# Altium PCB WirelessLamp.PcbDoc (part 1 of 2)
Units mm, origin at the board's own origin, x right, y up, seen from the top; angles counter-clockwise.
Board outline 95.76 x 95.69 mm, 2 copper layers (Top Layer, Bottom Layer); 124 components, 86 nets, 387 pads, 228 vias.
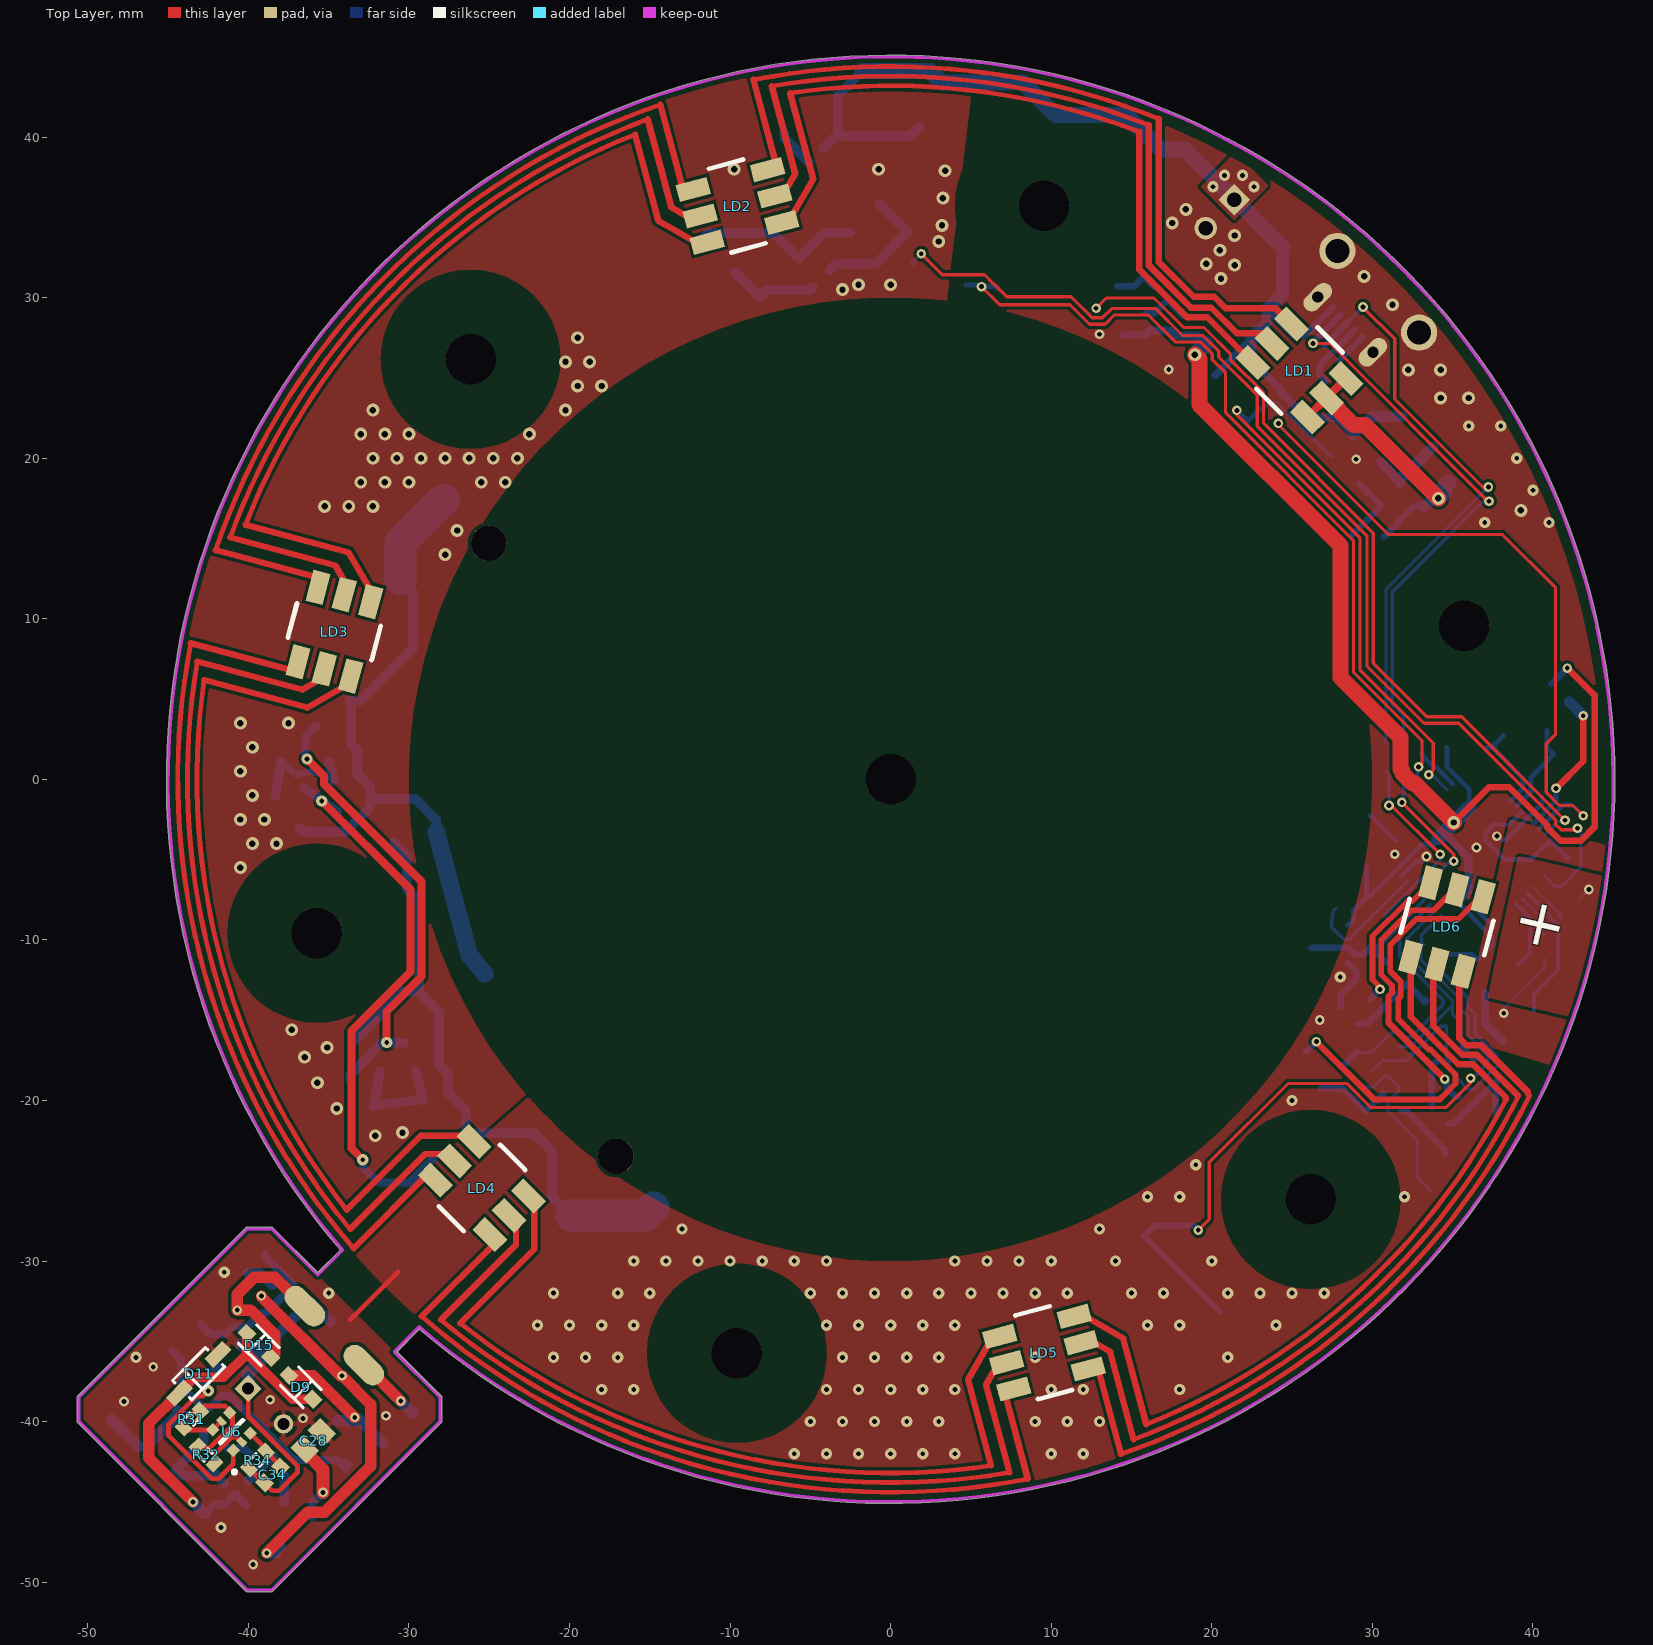
[diagram p0: Top Layer view]
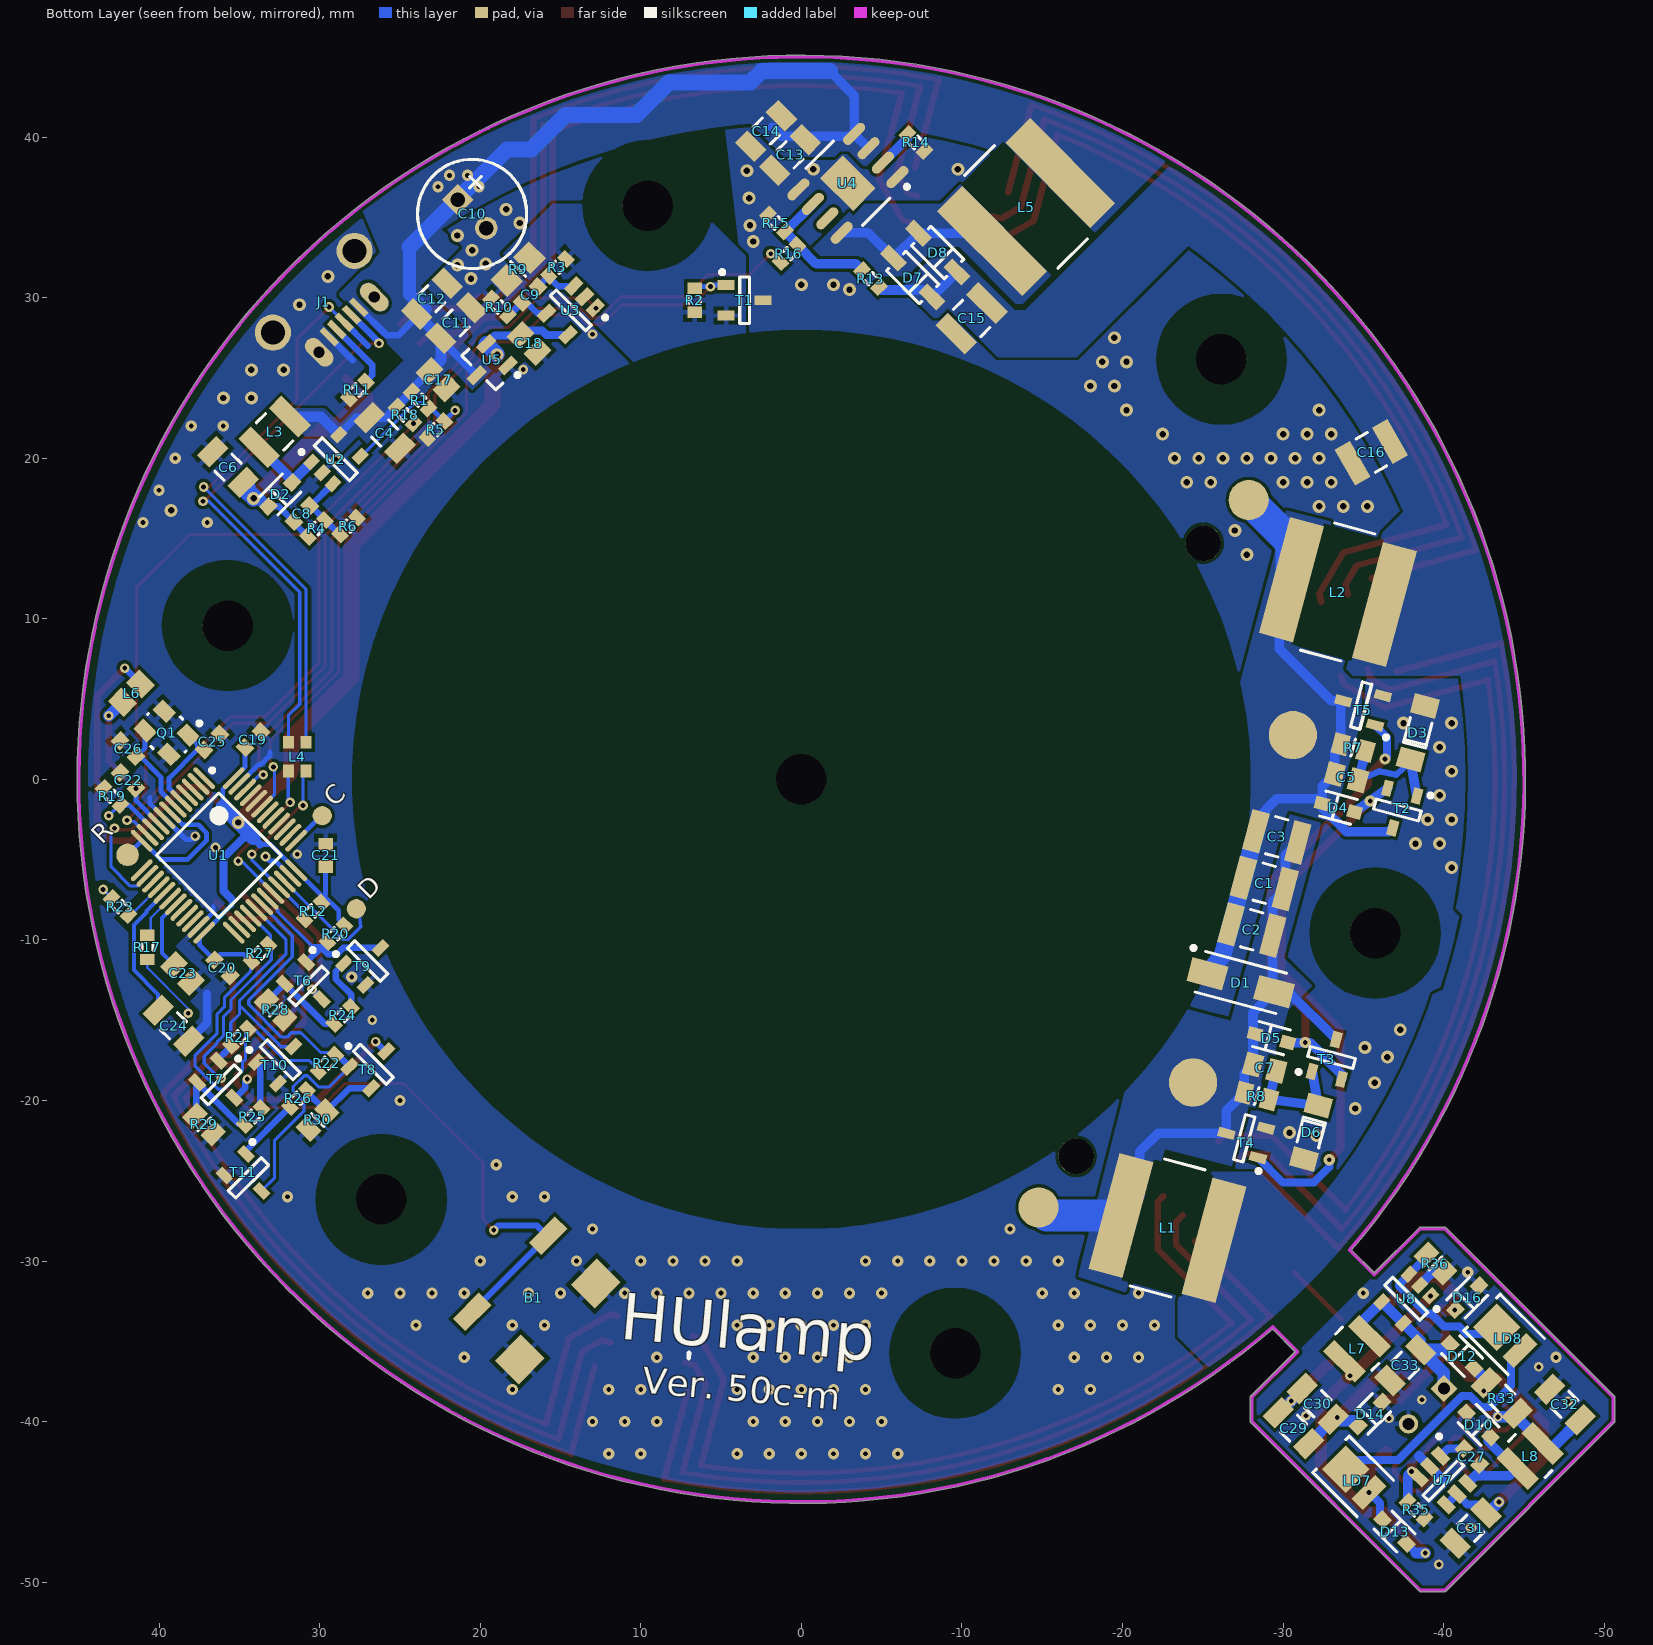
[diagram p1: Bottom Layer view, seen from below]

## Layer stack, top to bottom
Top Solder: solder mask 0.0102, Solder Resist, Dk 3.5
Top Layer: signal copper 0.0356
Dielectric 1: dielectric 0.32, FR-4, Dk 4.8
Bottom Layer: signal copper 0.0356
Bottom Solder: solder mask 0.0102, Solder Resist, Dk 3.5

## Board outline
-50.661,-39.991 ccw(c-50.561,-39.991) -50.632,-40.062 -40.132,-50.562 ccw(c-40.061,-50.491) -40.061,-50.592 -38.561,-50.592 ccw(c-38.561,-50.491) -38.49,-50.562 -27.99,-40.062 ccw(c-28.061,-39.991) -27.96,-39.991 -27.96,-38.491 ccw(c-28.061,-38.491) -27.99,-38.42 -30.765,-35.645 -29.358,-34.237 ccw(c0,0) 45.1,0 ccw(c0,0) -34.27,-29.319 -35.68,-30.73 -38.49,-27.92 ccw(c-38.561,-27.991) -38.561,-27.891 -40.061,-27.891 ccw(c-40.061,-27.991) -40.132,-27.92 -50.632,-38.42 ccw(c-50.561,-38.491) -50.661,-38.491

## Design rules (kind name [scope] priority, off if disabled: settings)
BoardOutlineClearance [All] p1: gap=0.3 ignorepadtopadclearanceinfootprint=FALSE except(0: Arc-SplitContinuation Track-SplitContinuation SMDPad-SplitContinuation THPad-SplitContinuation Via-SplitContinuation Fill-SplitContinuation Poly-SplitContinuation Region-SplitContinuation Text-SplitContinuation)
Clearance Clearance_3 [(Net = Touch_Button)] p1: gap=0.3 ignorepadtopadclearanceinfootprint=FALSE except(0: Arc-Hole Track-Hole SMDPad-Hole THPad-Hole Via-Hole Fill-Hole Poly-Hole Region-Hole Text-Hole)
Clearance Clearance_1 [OnLayer('Top Layer') vs (PadXSize_AllLayers >= 3.1) And (PadYSize_AllLayers >= 3.1)] p2: gap=4 ignorepadtopadclearanceinfootprint=FALSE except(0: Arc-Hole Track-Hole SMDPad-Hole THPad-Hole Via-Hole Fill-Hole Poly-Hole Region-Hole Text-Hole)
Clearance Clearance_2 [OnLayer('Bottom Layer') vs (PadXSize_AllLayers >= 3.1) And (PadYSize_AllLayers >= 3.1)] p3: gap=2.5 ignorepadtopadclearanceinfootprint=FALSE except(0: Arc-Hole Track-Hole SMDPad-Hole THPad-Hole Via-Hole Fill-Hole Poly-Hole Region-Hole Text-Hole)
Clearance [All] p4: gap=0.2 ignorepadtopadclearanceinfootprint=FALSE except(0: Arc-Hole Track-Hole SMDPad-Hole THPad-Hole Via-Hole Fill-Hole Poly-Hole Region-Hole Text-Hole)
ComponentClearance [All] p1: gap=0.1 collisioncheckmode=3 verticalgap=0.254 showdistances=FALSE
DiffPairsRouting [All] p1: maxlimit=2 minlimit=0.2 mostfreqgap=0.3 toplayer_minwidth=0.2 toplayer_maxwidth=0.4 toplayer_prefwidth=0.3 bottomlayer_minwidth=0.2 bottomlayer_maxwidth=0.4 bottomlayer_prefwidth=0.3 maxuncoupledlength=12.7
HoleSize [All] p1: absolutevalues=TRUE maxlimit=5 minlimit=0.3 maxpercent=80.000 minpercent=20.000
MinimumSolderMaskSliver [All] p1: minsoldermaskwidth=0.2
PlaneConnect [All] p1: planeconnectstyle=Relief reliefexpansion=0.508 reliefentries=4 reliefconductorwidth=0.3 reliefairgap=0.254
PolygonConnect "10V Net" [InNet('10V')] p1: connectstyle=Direct reliefconductorwidth=0.254 reliefentries=4 polygonreliefangle="90 Angle" airgapwidth=0.254
PolygonConnect Components [(Component = C10) Or (Component = C11) Or (Component = C12) Or (Component = R9) Or (Component = J1)] p2: connectstyle=Direct reliefconductorwidth=0.254 reliefentries=4 polygonreliefangle="90 Angle" airgapwidth=0.254
PolygonConnect "Power Nets" [(Net = TxCore1) Or (Net = TxCore2) Or (Net = Touch_Button) Or (Net = Touch_Shield) Or (Net = NetD7_1)] p3: connectstyle=Direct reliefconductorwidth=0.254 reliefentries=4 polygonreliefangle="90 Angle" airgapwidth=0.254
PolygonConnect "Power shunt line" [InNet('NetR1_2')] p4: connectstyle=Direct reliefconductorwidth=0.254 reliefentries=4 polygonreliefangle="90 Angle" airgapwidth=0.254
PolygonConnect "5V Net" [InNet('5V')] p5: connectstyle=Direct reliefconductorwidth=0.254 reliefentries=4 polygonreliefangle="90 Angle" airgapwidth=0.254
PolygonConnect Shunt [(Component = R5) And (Net = GND)] p6: connectstyle=Direct reliefconductorwidth=0.254 reliefentries=4 polygonreliefangle="90 Angle" airgapwidth=0.254
PolygonConnect Vias [InNet('GND') vs IsVia] p7: connectstyle=Direct reliefconductorwidth=0.254 reliefentries=4 polygonreliefangle="90 Angle" airgapwidth=0.254
PolygonConnect "aGND Net" [InNet('aGND')] p8: connectstyle=Direct reliefconductorwidth=0.254 reliefentries=4 polygonreliefangle="90 Angle" airgapwidth=0.254
PolygonConnect [All] p9: connectstyle=Relief reliefconductorwidth=0.3 reliefentries=4 polygonreliefangle="90 Angle" airgapwidth=0.254
RoutingVias [All] p1: holewidth=0.3 width=0.7 viastyle="Through Hole" minholewidth=0.3 minwidth=0.6 maxholewidth=4 maxwidth=5
SilkToSilkClearance [All] p1: silktosilkclearance=0
SilkToSolderMaskClearance [IsPad] p1: minsilkscreentomaskgap=0.1 clearancetoexposedcopper=TRUE
SolderMaskExpansion [All] p1: expansion=0.102
Width [All] p1: maxlimit=2 minlimit=0.127 preferedwidth=0.3 minimp=50.000000 maximp=50.000000 favimp=50.000000
23 further rules are at their usual default settings.

## Classes and differential pairs
component class WirelessLamp: B1 C1 C2 C3 C4 C5 C6 C7 C8 C9 C10 C11 C12 C13 C14 C15 C16 C17 C18 C19 C20 C21 C22 C23 C24 C25 C26 C? D1 D2 D3 D4 D5 D6 D7 D8 D? J1 L1 L2 L3 L4 L5 L6 L? LD1 LD2 LD3 LD4 LD5 LD6 Q1 Q? R1 R2 R3 R4 R5 R6 R7 R8 R9 R10 R11 R12 R13 R14 R15 R16 R17 R18 R19 R20 R21 R22 R23 R24 R25 R26 R27 R28 R29 R30 R? T1 T2 T3 T4 T5 T6 T7 T8 T9 T10 T11 U1 U2 U3 U4 U5
component class WirelessLampReceiver: C27 C28 C29 C30 C31 C32 C33 C34 D9 D10 D11 D12 D13 D14 D15 D16 L7 L8 LD7 LD8 R31 R32 R33 R34 R35 R36 U6 U7 U8 U9
differential pair USB_D: +USB_D_P -USB_D_N

## Components (designator, comment, footprint, x,y, rotation, side; value= is the part's Value field where it differs from the comment)
B1 "Button 5.1x5.1" "TS-1187 combo" 16.829,-32.103 r135 bottom
C1 "47n" CAPC3225L -28.837,-6.477 r15 bottom
C2 "47n" CAPC3225L -28.06,-9.374 r15 bottom
C3 "47n" CAPC3225L -29.613,-3.579 r15 bottom
C4 "4.7u" CAPC3216L 25.951,21.567 r225 bottom
C5 "200p" CAPC2012L -33.941,0.141 r195 bottom
C6 "4.7u" CAPC3216L 35.709,19.445 r225 bottom
C7 "200p" CAPC2012L -28.85,-17.961 r195 bottom
C8 "4.7p" CAPC1608L 31.113,16.546 r315 bottom
C9 "1u" CAPC1608L 16.9,30.193 r135 bottom
C10 "330u" CAPPR250-680X1080 20.506,35.214 r225 bottom
C11 "10u" CAPC3216L 21.496,28.426 r315 bottom
C12 "10u" CAPC3216L 23.009,29.939 r315 bottom
C13 "10u" CAPC3216L 0.707,38.891 r135 bottom
C14 "10u" CAPC3216L 2.192,40.376 r135 bottom
C15 "10u" CAPC3225L -10.607,28.709 r135 bottom
C16 "10u" CAPC3225L -35.497,20.365 r150 bottom
C17 "1u" CAPC2012L 22.627,24.89 r45 bottom
C18 "1u" CAPC2012L 16.971,27.153 r45 bottom
C19 "0.1u" CAPC1608L 34.153,2.475 r315 bottom
C20 "0.1u" CAPC1608L 36.062,-11.738 r45 bottom
C21 "0.1u" CAPC1608L 29.628,-4.738 r270 bottom
C22 "1u" CAPC1608L 41.931,-0.071 r225 bottom
C23 "0.1u" CAPC2012L 38.537,-12.092 r45 bottom
C24 "47n" CAPC3216L 39.103,-15.344 r45 bottom
C25 "18p" CAPC1608L 36.699,2.333 r135 bottom
C26 "18p" CAPC1608L 41.931,1.909 r45 bottom
C27 "0.1u" CAPC1608L -41.756,-42.181 r225 bottom
C28 "4.7u" CAPC2012L -35.958,-41.191 r45 top
C29 "47n" CAPC3216L -30.655,-40.413 r45 bottom
C30 "47n" CAPC3216L -32.161,-38.891 r225 bottom
C31 "4.7u" CAPC3216L -41.686,-46.635 r135 bottom
C32 "22u" CAPC3216L -47.555,-38.928 r225 bottom
C33 "22u" CAPC3216L -37.618,-36.487 r135 bottom
C34 "120p" CAPC1608L -38.504,-43.312 r225 top
D1 "SMAFJ36CA" DIOM5226X262N -27.365,-12.657 r195 bottom
D2 "SGP0160SL" SOD-323F 32.456,17.748 r315 bottom
D3 "ZMM5246B" MELF-D3512-1405 -38.396,2.899 r285 bottom
D4 "SGP0160SL" SOD-323F -33.446,-1.768 r15 bottom
D5 "SGP0160SL" SOD-323F -29.274,-16.122 r15 bottom
D6 "ZMM5246B" MELF-D3512-1405 -31.749,-21.991 r105 bottom
D7 "DS24W" SOD123 -6.93,31.254 r225 bottom
D8 "DS24W" SOD123 -8.485,32.81 r225 bottom
D9 "SGP0160SL" SOD-323F -36.736,-37.867 r315 top
D10 "SGP0160SL" SOD-323F -42.181,-40.201 r225 bottom
D11 "MM1Z39" SOD123 -43.1,-37.019 r225 top value=39V
D12 "SGP0160SL" SOD-323F -41.154,-35.921 r45 bottom
D13 "SGP0160SL" SOD-323F -36.948,-46.847 r45 bottom
D14 "SGP0160SL" SOD-323F -35.426,-39.527 r315 bottom
D15 "SGP0160SL" SOD-323F -39.352,-35.251 r135 top
D16 "SGP0160SL" SOD-323F -41.473,-32.281 r315 bottom
J1 "USB Con" ZX62D-B-5PA8 31.891,31.891 r225 bottom
L1 "68u" "Ind 8x8" -22.806,-27.938 r195 bottom
L2 "68u" "Ind 8x8" -33.418,11.665 r15 bottom
L3 "10u" INDC3225L 32.81,21.637 r315 bottom
L4 "MCM2012B" MCM2012B 31.396,1.414 r270 bottom
L5 "4.7u" "Ind 8x8" -14.001,35.638 r315 bottom
L6 "22u" INDC2012L 41.719,5.374 r315 bottom
L7 "10u" "Ind 3x3" -34.614,-35.463 r315 bottom
L8 "10u" "Ind 3x3" -45.396,-42.144 r135 bottom
LD1 "LED" LED5060 25.456,25.456 r135 top
LD2 "LED" LED5060 -9.546,35.709 r195 top
LD3 "LED" LED5060 -34.648,9.192 r255 top
LD4 "LED" LED5060 -25.456,-25.456 r315 top
LD5 "LED" LED5060 9.546,-35.709 r15 top
LD6 "LED" LED5060 34.648,-9.192 r75 top
LD7 "LED2825" LED2835 -34.473,-43.524 r45 bottom
LD8 "LED2825" LED2835 -43.878,-34.685 r45 bottom
Q1 "12Meg" XTAL_ABRACON_ABM8-166 39.527,2.899 r315 bottom
R1 "10k" RESC1608L 23.759,23.617 r45 bottom
R2 "10k" RESC1608L 6.647,29.84 r270 bottom
R3 "4.7" RESC1608L 15.203,31.891 r135 bottom
R4 "150k" RESC1608L 30.193,15.627 r315 bottom
R5 "10k" RESC1608L 22.769,21.779 r135 bottom
R6 "10k" RESC1608L 28.214,15.768 r315 bottom
R7 "4.7k" RESC2012L -34.365,1.98 r195 bottom
R8 "4.7k" RESC2012L -28.355,-19.728 r195 bottom
R9 "7.5m" RESC2012M 17.638,31.78 r135 bottom
R10 "4.7" RESC1608L 18.809,29.416 r45 bottom
R11 "1k" RESC1608L 27.648,24.254 r315 bottom
R12 "1k5" RESC1608L 30.406,-8.202 r315 bottom
R13 "16k" RESC1608L -4.313,31.183 r225 bottom
R14 "47k" RESC1608L -7.142,39.669 r45 bottom
R15 "1k" RESC1608L 1.556,34.648 r225 bottom
R16 "10k" RESC1608L 0.778,32.739 r315 bottom
R17 "1k" RESC1608L 40.729,-10.465 r270 bottom
R18 "10k" RESC1608L 24.678,22.698 r45 bottom
R19 "1k" RESC1608L 42.921,-1.061 r225 bottom
R20 "10k" RESC1608L 28.991,-9.617 r135 bottom
R21 "10k" RESC1608L 35.002,-16.051 r135 bottom
R22 "10k" RESC1608L 29.557,-17.678 r315 bottom
R23 "1k" RESC1608L 42.426,-7.92 r225 bottom
R24 "4.7k" RESC1608L 28.567,-14.708 r135 bottom
R25 "4.7k" RESC1608L 34.153,-21.001 r135 bottom
R26 "4.7k" RESC1608L 31.325,-19.87 r315 bottom
R27 "10k" RESC1608L 33.729,-10.819 r315 bottom
R28 "470" RESC2012L 32.739,-14.354 r225 bottom
R29 "300" RESC2012L 37.194,-21.496 r45 bottom
R30 "470" RESC2012L 30.123,-21.213 r135 bottom
R31 "47k" RESC1608L -43.524,-39.847 r45 top
R32 "47k" RESC1608L -42.639,-42.073 r315 top
R33 "1.5" RESC3216L -43.628,-38.537 r45 bottom
R34 "36k" RESC1608L -39.423,-42.393 r225 top
R35 "16k" RESC1608L -38.291,-45.504 r45 bottom
R36 "120" RESC2012L -39.494,-30.16 r45 bottom
T1 "NCE3416" SOT95P237X112-3N 3.536,29.84 r180 bottom
T2 "BC847B" SOT95P230X110-3N -37.123,-1.909 r285 bottom
T3 "BC847B" SOT95P230X110-3N -33.022,-17.324 r105 bottom
T4 "NCE6003" SOT95P237X112-3N -27.577,-22.345 r15 bottom
T5 "NCE6003" SOT95P237X112-3N -34.86,4.596 r15 bottom
T6 "2N7002K" SOT95P237X112-3N 30.688,-12.869 r225 bottom
T7 "2N7002K" SOT95P237X112-3N 36.133,-19.021 r225 bottom
T8 "2N7002K" SOT95P237X112-3N 26.658,-17.748 r135 bottom
T9 "BC847B" SOT95P230X110-3N 27.011,-11.314 r135 bottom
T10 "BC847B" SOT95P230X110-3N 32.456,-17.466 r135 bottom
T11 "BC847B" SOT95P230X110-3N 34.436,-24.819 r225 bottom
U1 "STM32F072C8T6" STM-LQFP48_N 36.275,-4.738 r225 bottom
U2 "TPS6104x" SOT23-5AL 28.991,19.94 r135 bottom
U3 "INA180A" SOT23-5AN 14.354,29.204 r315 bottom
U4 "FP6298" SOIC127P600-8DL -2.899,37.123 r315 bottom
U5 "MCP1700" SOT23-3L 19.587,25.809 r315 bottom value=3.3V
U6 "BC847BPN" sot-363-6 -41.049,-40.625 r135 top
U7 "BL9352A" SOT26A-6N -39.988,-43.665 r225 bottom
U8 "AP3015KTR-G1" SOT23-5AL -37.669,-32.35 r315 bottom

## Footprints (in the part's own frame and the unit in brackets; to place one, negate y for a bottom-side part, rotate by r counter-clockwise, add the part's x,y. Pads: shape width x height; smd on the part's side, far side on the other; paste and mask are expansions set on the pad)
CAPC1608L [mm] "Chip Capacitor, Body 1.6x0.8mm, IPC High Density"
  rect 0.8x0.9 smd: 1(-0.7,0) 2(0.7,0)
  body extent -0.87,-0.48 0.87,0.47, height 0.85
CAPC2012L [mm] "Chip Capacitor, Body 2.0x1.3mm, IPC High Density"
  rect 1.1x1.4 smd: 1(-0.75,0) 2(0.75,0)
  body extent -1.1,-0.73 1.1,0.73, height 1.1
CAPC3216L [mm] "Chip Capacitor, Body 3.2x1.6mm, IPC High Density"
  rect 1.1x1.7 smd: 1(-1.35,0) 2(1.35,0)
  silkscreen extent -0.4,-0.75 0.4,0.75, body extent -1.7,-0.9 1.7,0.9, height 1.35
CAPC3225L [mm] "Chip Capacitor, Body 3.2x2.5mm, IPC High Density"
  rect 1.1x2.6 smd: 1(-1.35,0) 2(1.35,0)
  silkscreen extent -0.4,-1.2 0.4,1.2, body extent -1.7,-1.35 1.7,1.35, height 1.35
CAPPR250-680X1080 [mm] "Capacitor, Radial, Pin spacing 2.5mm - Body Diameter 6.8mm X Body Height 10.8mm"
  rect 1.4x1.4 hole 0.9: 1(-1.25,0)
  round 1.4 hole 0.9: 2(1.25,0)
  silkscreen extent -3.4,-3.4 3.4,3.4, body extent -3.41,-3.41 3.39,3.39, height 10.8
DIOM5226X262N [mm] "DO-214-AC/SMA Diode, Molded Body; 5.21mm L X 2.605mm W X 2.62mm H, IPC Medium Density"
  rect 2.3x1.55 smd: 1(-2.15,0) 2(2.15,0)
  silkscreen extent -3.52,-1.3 2.6,1.45, body extent -2.6,-1.3 2.6,1.31, height 2.62
"Ind 3x3" [mm]
  rect 1x2.8 smd: 1(-1.1,0) 2(1.1,0)
  silkscreen extent -0.3,-1.6 0.3,1.6
"Ind 8x8" [mm]
  rect 2.2x7.5 smd: 1(-3,0) 2(3,0)
  silkscreen extent -1.3,-4.1 1.3,4.1
INDC2012L [mm] "Chip Inductor, Body 2.0x1.2mm, IPC High Density"
  rect 1.2x1.4 smd: 1(-0.8,0) 2(0.8,0)
  body extent -1.1,-0.7 1.1,0.7, height 1.1
INDC3225L [mm] "Chip Inductor, Body 3.2x2.5mm, IPC High Density"
  rect 1.1x2.6 smd: 1(-1.35,0) 2(1.35,0)
  silkscreen extent -0.4,-1.2 0.4,1.2, body extent -1.7,-1.35 1.7,1.35, height 1.5
LED2835 [mm]
  rect 2.1x2.1 smd: 1(0.8,0)
  rect 1x2.1 smd: 2(-1.25,0)
  silkscreen extent -1.8,-1.6 2.1,1.6
LED5060 [mm]
  rect 2x1.1 smd: 1(-2.4,1.7) 2(-2.4,0) 3(-2.4,-1.7) 4(2.4,-1.7) 5(2.4,0) 6(2.4,1.7)
  silkscreen extent -1.1,-2.7 1.1,2.7
MCM2012B [mm]
  rect 0.8x0.7 smd: 1(-0.9,0.55) 2(0.9,0.55) 3(0.9,-0.55) 4(-0.9,-0.55)
MELF-D3512-1405 [mm] "Metal Electrode Face (MELF) Diode; Body 3.5 x 1.5 mm (LxDia)"
  rect 1.25x1.6 smd: 1(-1.725,0) 2(1.725,0)
  silkscreen extent -0.8,-0.7 0.8,0.7
RESC1608L [mm] "Chip Resistor, Body 1.6x0.8mm, IPC High Density"
  rect 0.7x0.9 smd: 1(-0.75,0) 2(0.75,0)
  silkscreen extent -0.2,-0.35 0.2,0.35, body extent -0.85,-0.47 0.85,0.48, height 0.6
RESC2012L [mm] "Chip Resistor, Body 2.0x1.3mm, IPC High Density"
  rect 1x1.3 smd: 1(-0.8,0) 2(0.8,0)
  silkscreen extent 0,-0.55 0,0.55, body extent -1.07,-0.7 1.08,0.7, height 0.65
RESC2012M [mm] "Chip Resistor, Body 2.0x1.3mm, IPC Low Density"
  rect 1.4x1.5 smd: 1(-1,0) 2(1,0)
  silkscreen extent 0,-0.65 0,0.65, body extent -1.07,-0.7 1.07,0.7, height 0.65
RESC3216L [mm] "Chip Resistor, Body 3.2x1.6mm, IPC High Density"
  rect 1.1x1.7 smd: 1(-1.35,0) 2(1.35,0)
  silkscreen extent -0.4,-0.75 0.4,0.75, body extent -1.67,-0.88 1.68,0.88, height 0.71
SOD123 [mm] "SOD-123; 2 Leads; Body 2.7 x 1.6 mm, (LxW)"
  rect 1.6x0.8 smd: 1(-1.7,0) 2(1.7,0)
  silkscreen extent -1.45,-0.85 1.45,0.85
SOD-323F [mm]
  rect 0.9x0.8 smd: 1(-1.05,0) 2(1.05,0)
  silkscreen extent -1,-0.8 1,0.8
SOIC127P600-8DL [mm] "8-Pin Small Outline Integrated Circuit 1.27 mm Pitch"
  oval 1.7x0.6 smd: 1(-2.45,1.905) 2(-2.45,0.635) 3(-2.45,-0.635) 4(-2.45,-1.905) 5(2.45,-1.905) 6(2.45,-0.635) 7(2.45,0.635) 8(2.45,1.905)
  rect 2x2.9 smd: 9(0,0)
  silkscreen extent -2.57,-2.5 1.2,2.88, body extent -2,-2.5 2,2.5, height 1.55
SOT23-3L [mm] "SOT23, 3-Leads, Body 2.9x1.3mm, Pitch 0.95mm, Lead Span 2.5mm, IPC High Density"
  rect 1.2x0.6 smd: 1(-0.9,0.95) 2(-0.9,-0.95) 3(0.9,0)
  silkscreen extent -1.02,-1.5 0.7,1.92, body extent -0.7,-1.5 0.7,1.5, height 1.1
SOT23-5AL [mm] "SOT23, 5-Leads, Body 2.9x1.6mm, Pitch 0.95mm, Lead Span 2.8mm, IPC High Density"
  rect 0.9x0.65 smd: 1(-1.2,0.95) 2(-1.2,0) 3(-1.2,-0.95) 4(1.2,-0.95) 5(1.2,0.95)
  silkscreen extent -1.32,-1.55 0.35,1.95, body extent -0.9,-1.55 0.9,1.55, height 1.45
SOT23-5AN [mm] "SOT23, 5-Leads, Body 2.9x1.6mm, Pitch 0.95mm, Lead Span 2.8mm, IPC Medium Density"
  rect 1.1x0.65 smd: 1(-1.2,0.95) 2(-1.2,0) 3(-1.2,-0.95) 4(1.2,-0.95) 5(1.2,0.95)
  silkscreen extent -1.32,-1.55 0.25,1.95, body extent -0.9,-1.55 0.9,1.55, height 1.45
SOT26A-6N [mm] "SOT23, 6-Leads, Body 2.9x1.7mm, Pitch 0.95mm, Lead Span 2.8mm, IPC Medium Density"
  rect 1.1x0.65 smd: 1(-1.2,0.95) 2(-1.2,0) 3(-1.2,-0.95) 4(1.2,-0.95) 5(1.2,0) 6(1.2,0.95)
  silkscreen extent -2.25,-1.55 0.25,1.87, body extent -0.9,-1.55 0.9,1.55, height 1.45
SOT95P230X110-3N [mm] "SOT23, 3 pin, Pitch 0.95mm - 1.3mm W X 2.9mm L X 1.1mm H, IPC Medium Density"
  rect 1x0.6 smd: 1(-1.15,0.95) 2(-1.15,-0.95) 3(1.15,0)
  silkscreen extent -1.52,-1.45 0.33,1.87, body extent -1.08,-1.5 1.25,1.5, height 1.1
SOT95P237X112-3N [mm] "SOT, 0.95mm, pitch; 3 pin,1.30mm W X 2.92mm L X 1.12mm H body, IPC Medium Density"
  rect 1.05x0.6 smd: 1(-1.15,0.95) 2(-1.15,-0.95) 3(1.15,0)
  silkscreen extent -1.52,-1.45 0.3,1.87, body extent -1.25,-1.5 1.25,1.5, height 1.1
sot-363-6 [mm]
  rect 0.6x0.6 smd: 1(-0.9,0.75) 3(-0.9,-0.75) 4(0.9,-0.75) 6(0.9,0.75)
  rect 0.6x0.4 smd: 2(-0.9,0) 5(0.9,0)
  silkscreen extent -2,-1 0,1.75
STM-LQFP48_N [mm] "QFP, 48-Leads, Body 7x7mm, Pitch 0.5mm, IPC Medium Density"
  oval 1.8x0.3 smd: 1(-4.05,2.75) 2(-4.05,2.25) 3(-4.05,1.75) 4(-4.05,1.25) 5(-4.05,0.75) 6(-4.05,0.25) 7(-4.05,-0.25) 8(-4.05,-0.75) 9(-4.05,-1.25) 10(-4.05,-1.75) 11(-4.05,-2.25) 12(-4.05,-2.75) 25(4.05,-2.75) 26(4.05,-2.25) 27(4.05,-1.75) 28(4.05,-1.25) 29(4.05,-0.75) 30(4.05,-0.25) 31(4.05,0.25) 32(4.05,0.75) 33(4.05,1.25) 34(4.05,1.75) 35(4.05,2.25) 36(4.05,2.75)
  oval 0.3x1.8 smd: 13(-2.75,-4.05) 14(-2.25,-4.05) 15(-1.75,-4.05) 16(-1.25,-4.05) 17(-0.75,-4.05) 18(-0.25,-4.05) 19(0.25,-4.05) 20(0.75,-4.05) 21(1.25,-4.05) 22(1.75,-4.05) 23(2.25,-4.05) 24(2.75,-4.05) 37(2.75,4.05) 38(2.25,4.05) 39(1.75,4.05) 40(1.25,4.05) 41(0.75,4.05) 42(0.25,4.05) 43(-0.25,4.05) 44(-0.75,4.05) 45(-1.25,4.05) 46(-1.75,4.05) 47(-2.25,4.05) 48(-2.75,4.05)
  silkscreen extent -4.17,-2.75 2.75,3.57, body extent -3.5,-3.5 3.5,3.5, height 1.6
"TS-1187 combo" [mm]
  rect 2.3x1.1 smd: 1(-3.35,1.85) 2(3.35,1.85)
  rect 2.3x2.1 smd: 3(-3.35,-2.35) 4(3.35,-2.35)
XTAL_ABRACON_ABM8-166 [mm] "4 Pins, SMD Crystal, Body 3.2x2.5mm, ABM8 Series"
  rect 0.9x1.2 smd: 1(-0.85,1.05) 2(-0.85,-1.05) 3(0.85,-1.05) 4(0.85,1.05)
  silkscreen extent -1.98,-1.65 1.3,1.65, body extent -1.24,-1.6 1.24,1.6, height 0.75
ZX62D-B-5PA8 [mm]
  rect 1.35x0.4 smd mask-0.675: 1(4.825,1.3) 2(4.825,0.65) 3(4.825,0) 4(4.825,-0.65) 5(4.825,-1.3)
  round 2.25 hole 1.5: S1(2.15,-3.6) S2(2.15,3.6)
  oval 2.1x1.05 hole 0.7: S3(5.05,2.425) S4(5.05,-2.425)
  Mechanical 10 keep-out region: 2.9,3.75 4.1,3.75 4.1,-3.75 2.9,-3.75
  Mechanical 10 keep-out region: 1.4,2.85 2.9,2.85 2.9,-2.85 1.4,-2.85
  Mechanical 10 keep-out region: 0,3.75 1.4,3.75 1.4,-3.75 0,-3.75

## Part data
B1: LCSC Part=C318884, Link=https://lcsc.com/product-detail/Tactile-Switches_XKB-Enterprise-TS-1187-B-A-A_C318884.html, Part=TS-1187A-B-A-B
C1 C2 C3 C29 C30: library part Capacitor, Case=1206, LCSC Part=C21812, Voltage=50V, Link=https://lcsc.com/product-detail/Multilayer-Ceramic-Capacitors-MLCC-SMD-SMT_muRata_GRM31M5C1H473JA01L_47nF-473-10-50V_C21812.html, Name=NP0, Part=GRM31M5C1H473JA01L
C4 C11 C12 C24 C28 C32 C33: library part Capacitor, Case=1206
C5 C7: library part Capacitor, Case=0805, Voltage=50V
C6 C31: library part Capacitor, Case=1206, Voltage=50V
C8 C9 C19 C20 C21 C22 C25 C26 C27 C34: library part Capacitor, Case=0603
C10: library part CAER_100UF_16V_20%_CHEMI-CON_APSA160ELL101MFA5G, "Polarised capacitor", Case="LS2.5 D6.3 x H10.5", LCSC Part=C176297, Voltage=6.3V, Author="CERN DEM JLC", Link=https://lcsc.com/product-detail/Solid-Polymer-Electrolytic-Capacitor_330uF-6-3V_C176297.html, Part=6R3AREP331M06X5E20
C13 C14: library part Capacitor, Case=1206, Voltage=16V
C15 C16: library part Capacitor, Case=1210, Voltage=50V
C17 C18: library part Capacitor
C23: library part Capacitor, Case=0805
D1: library part SMAJ24CA, "Transient Voltage Suppressor Diode (Bi-Directional)", Case=DO-214AC, LCSC Part=C169459, Author="CERN DEM JLC", Link=https://lcsc.com/product-detail/TVS_SMAFJ36CA_C169459.html, Name=SMAFJ36CA, Part=SMAFJ36CA
D2 D4 D5 D9 D10 D12 D13 D14 D15 D16: library part Schotky, Case=SOD-323F, LCSC Part=C110413, Name=SGP0160SL, Part=SGP0160SL
  D2 D5 D9 D10 D12 D13 D14 D15 D16: Link=https://lcsc.com/product-detail/Schottky-Barrier-Diodes-SBD_SGP0160SL_C110413.html
  D4: Limk=https://lcsc.com/product-detail/Schottky-Barrier-Diodes-SBD_SGP0160SL_C110413.html
D3 D6: library part Diode_MELF, Case=LL-34, LCSC Part=C118699, Link=https://lcsc.com/product-detail/Zener-Diodes_ZMM5246B_C118699.html, Name=ZMM5246B, Part=ZMM5246B
D7 D8: library part Schotky, Case=SOD-123F, LCSC Part=C108810, Link=https://lcsc.com/product-detail/Schottky-Barrier-Diodes-SBD_DS24W_C108810.html, Name=DS24W, Part=DS24W
D11: library part Schotky, Case=SOD-123, LCSC Part=C107460, Link=https://lcsc.com/product-detail/Zener-Diodes_MM1Z39_C107460.html, Name=MM1Z39, Part=MM1Z39
J1: library part USB, Datasheet=https://media.digikey.com/pdf/Data%20Sheets/Hirose%20PDFs/ZX62D-AB-5P8%20RoHS.pdf
L1 L2: library part Inductor, Case=8040, LCSC Part=C266439, Link=https://lcsc.com/product-detail/Inductors-SMD_ShunXiang-Connaught-Elec-SMNR8040-680MT_C266439.html, Name=SMNR8040-680MT, Part=SMNR8040-680MT
L3: library part Inductor, Case=SMD,2.5x2.0x1.0mm, LCSC Part=C329581, Link=https://lcsc.com/product-detail/Inductors-SMD_Chilisin-Elec-MRSC252A10-100M-N_C329581.html, Name="Chilisin Elec MRSC252A10-100M-N", Part=MRSC252A10-100M-N
L4: LCSC Part=C315725, Link=https://lcsc.com/product-detail/EMI-RFI-Filters-LC-RC-Networks_INPAQ-MCM2012B900GBE_C315725.html, Name=MCM2012B, Part=MCM2012B900GBE
L5: library part Inductor, Case=8040, LCSC Part=C266436, Link=https://lcsc.com/product-detail/Inductors-SMD_ShunXiang-Connaught-Elec-SMNR8040-4R7MT_C266436.html, Name=SMNR8040-4R7MT, Part=SMNR8040-4R7MT
L6: library part Inductor, Case=0805
L7 L8: library part Inductor, Case=SMD,3x3x1.2mm, LCSC Part=C218837, Link=https://lcsc.com/product-detail/Inductors-SMD_Cyntec-PST031B-100MS_C218837.html, Name="Cyntec PST031B-100MS", Part=PST031B-100MS
LD1 LD2 LD3 LD4 LD5 LD6: library part "RGB LED 5060", LCSC Part=C219409, Link=https://lcsc.com/product-detail/Light-Emitting-Diodes-LED_Hongli-Zhihui-HONGLITRONIC-HL-AF-5060H271BU46FU79GC-S1-THL_C219409.html, Name=LED, Part=HL-AF-5060H271BU46FU79GC-S1-THL
Q1: library part XTAL_114.285MHZ_ABRACON_ABM8-166-114.285MHZ, "Crystal 4 pins 1=XTAL Control 2=GND3=XTAL 4=GND", LCSC Part=C251605, Author="CERN DEM MR", Link=https://lcsc.com/product-detail/SMD-Crystals_SHENZHEN-CRYSTAL-TECH-7U12000E12UCG_C251605.html, Part=7U12000E12UCG
R1 R2 R3 R4 R5 R6 R10 R13 R14 R15 R16 R17 R18 R19 R20 R21 R22 R23 R24 R25 R26 R27 R31 R32 R34 R35: library part Resistor, Case=0603
R7 R8 R28 R29 R30 R36: library part Resistor, Case=0805
R9: library part Resistor, Case=0805, LCSC Part=C156368
R11 R12: library part Resistor
R33: library part Resistor, Case=1206
T1: library part IRLML2803PBF, "N-CHANNEL MOSFET WITH ZENER DIODE", Case=SOT23-3, LCSC Part=C113491, Author="CERN DEM JMW", Link=https://lcsc.com/product-detail/MOSFET_Wuxi-NCE-Power-Semiconductor-NCE3416_C113491.html, Name=NCE3416, Part=NCE3416
T2 T3 T9 T10 T11: "NPN Transistor", Case=SOT23-3, Author="CERN DEM JLC", Name=BC847B
T4 T5: library part IRLML2803PBF, "N-CHANNEL MOSFET WITH ZENER DIODE", Case=SOT23-3, LCSC Part=C112351, Author="CERN DEM JMW", Link=https://lcsc.com/product-detail/MOSFET_Wuxi-NCE-Power-Semiconductor-NCE6003_C112351.html, Name=NCE6003, Part=NCE6003
T6 T7 T8: library part IRLML2803PBF, "N-CHANNEL MOSFET WITH ZENER DIODE", Case=SOT23-3, LCSC Part=C38161, Author="CERN DEM JMW", Link=https://lcsc.com/product-detail/MOSFET_Changjiang-Electronics-Tech-CJ-2N7002K_C38161.html, Name=2N7002K, Part=2N7002K
U1: library part STM32F103C8T6, "ARM Cortex-M3 32-bit MCU, 64 KB Flash, 20 KB Internal RAM, 37 I/Os, 48-pin LQFP, -40 to 85 degC, Tray", Case=LQFP48, LCSC Part=C80488, Name=STM32F072C8T6, PackageReference=LQFP48, Part=STM32F072C8T6
U2: LCSC Part=C9846, Link=https://lcsc.com/product-detail/DC-DC-Converters_TI_TPS61041DBVR_TPS61041DBVR_C9846.html, Name=TPS6104x, Part=TPS61041DBVR
U3: LCSC Part=C188337, Link=https://lcsc.com/product-detail/PMIC-Current-Power-Monitors-Regulators_TI_INA180A4IDBVR_INA180A4IDBVR_C188337.html, Name=INA180A, Part=INA180A4IDBVR
U4: LCSC Part=C88319, Link=https://lcsc.com/product-detail/DC-DC-Converters_FP6298XR-G1_C88319.html, Name=FP6298, Part=FP6298XR-G1
U5: LCSC Part=C255487, Link=https://lcsc.com/product-detail/Low-Dropout-Regulators-LDO_Jiangsu-RUNIC-Tech-RS3219-3-3YF3_C255487.html, Name=MCP1700, Part=RS3219-3.3YF3
U6: Case=SOT-363, LCSC Part=C8655, Link=https://lcsc.com/product-detail/Transistors-NPN-PNP_NXP_BC847BPN_BC847BPN_C8655.html, Name=BC847BPN, Part=BC847BPN,115
U7: "StepDown Regulator", LCSC Part=C193985, Link=https://lcsc.com/product-detail/Others_Shanghai-Belling-BL9352A_C193985.html, Name=BL9352A, Part=BL9352A
U8: library part TPS6104x, LCSC Part=C151334, Link=https://lcsc.com/product-detail/DC-DC-Converters_DIODES_AP3015KTR-G1_AP3015KTR-G1_C151334.html, Name=AP3015KTR-G1, Part=AP3015KTR-G1

## Free pads (board coordinates)
  rect 1.2x1.2 hole 0.75 rot 135: 1(-40.011,-37.941)
  round 1.2 hole 0.75: 2(-37.811,-40.141)
  oval 3x1.4 smd rot 135: 3(-32.81,-36.487) 4(-36.487,-32.81)
  round 3.1 hole 3.15 unplated: 16(9.574,35.737) 17(-26.163,26.163) 18(-35.737,-9.574) 19(-9.574,-35.737) 20(26.163,-26.163) 21(35.737,9.574)
  round 3.1 hole 3.15: 22(0,0)
  round 1.2 smd far side: 23(27.719,-8.061) 25(29.84,-2.263)
  round 1.4 smd far side: 26(41.967,-4.702)
  round 2.2 hole 2.2: 27(-17.112,-23.476) 28(-25.032,14.708)
  round 2.5 smd far side: 29(-14.779,-26.658) 30(-27.86,17.395)
  round 3 smd far side: 31(-24.395,-18.88) 32(-30.618,2.758)

## Via types
v1: diameter 0.7, hole 0.3, Top Layer to Bottom Layer, tented both sides, 104 vias
v2: diameter 0.8, hole 0.4, Top Layer to Bottom Layer, tented both sides, 71 vias
v3: diameter 0.6, hole 0.3, Top Layer to Bottom Layer, tented both sides, 41 vias
v4: diameter 0.6, hole 0.3, Top Layer to Bottom Layer, tented top, 9 vias
v5: diameter 0.7, hole 0.3, Top Layer to Bottom Layer, tented top, 1 vias
v6: diameter 0.6, hole 0.3, Top Layer to Bottom Layer, tented bottom, 1 vias
v7: diameter 0.6, hole 0.3, Top Layer to Bottom Layer, 1 vias

## Nets (pads, with @x,y where several pads share a name; then routed paths per layer and width w, separated by ;. In a path a pad name is that pad's centre, name@x,y a point inside that pad or via, vN(x,y) a via of type N, cw(c..) or ccw(c..) an arc to the next point about the centre after c; other vN are vias at no path point)
5V: C4.1 C10.1 C11.2 C12.2 C13.2 C14.2 C17.2 J1.1 L3.1 L5.1 R1.2 R18.2 U2.5 U4.3 U4.4 U5.3 | length 70.3
  Bottom Layer w0.4: 23.441,29.31 25.102,27.648 25.809,27.648 J1.1@27.56,29.398
  Bottom Layer w0.5: U5.3@20.223,25.173 22.451,27.4 C11.2@22.451,27.471 ; C17.2@23.158,25.42 24.289,24.289 R1.2@24.289,24.148 R18.2@25.208,23.228 25.915,22.521 C4.1@26.905,22.521 27.754,22.521 U2.5@28.815,21.461
  Bottom Layer w0.6: U4.3@-4.183,39.305 U4.4@-3.285,40.203 ; -1.768,44.104 -3.285,42.587 U4.4@-3.285,40.203 ; 1.803,40.623 1.237,40.058 -3.14,40.058 U4.4@-3.285,40.203
  Bottom Layer w0.65: U2.5@28.815,21.461 29.946,22.592 L3.1@31.855,22.592
  Bottom Layer w0.7: C11.2@22.451,27.4 22.451,26.128 C17.2@23.158,25.42 ; C11.2@22.451,27.471 23.441,28.461 23.441,29.31
  Bottom Layer w0.8: 23.441,29.31 23.511,29.31 24.395,30.193 24.395,33.163
  Bottom Layer w1: -1.768,44.104 2.475,44.104 3.175,43.404 8.24,43.404 10.278,41.366 14.694,41.366 16.827,39.232 18.326,39.232 24.395,33.163
  other v1: 20.082,36.911 22.627,36.911 20.789,37.618 21.92,37.618
10V: C15.2 C16.2 D7.2 D8.2 L1.2 L2.1 R13.2 | length 5.7
  Bottom Layer w0.6: D8.2@-9.687,31.608 D7.2@-8.132,30.052 -7.707,30.476 -5.02,30.476 R13.2@-4.844,30.653
aGND: C13.1 C14.1 C15.1 C16.1 D3.1 D6.1 R14.1 R15.1 T1.3 T4.2 T5.2 U4.1 U4.5 U4.9
  other v2: -32.1,-22.2 -30.4,-22 -34.5,-20.5 -35.7,-18.9 -36.5,-17.3 -35.1,-16.7 -37.3,-15.6 -40.5,-5.5 -39.75,-4 -38.25,-4 -40.5,-2.5 -39,-2.5 -39.75,-1 -40.5,0.5 -39.75,2 -40.5,3.5 -37.5,3.5 -27.75,14 -27,15.5 -35.25,17 -33.75,17 -32.25,17 -33,18.5 -31.5,18.5 -30,18.5 -25.5,18.5 -24,18.5 -32.25,20 -30.75,20 -29.25,20 -27.75,20 -26.25,20 -24.75,20 -23.25,20 -33,21.5 -31.5,21.5 -30,21.5 -22.5,21.5 -32.25,23 -20.25,23 -19.5,24.5 -18,24.5 -20.25,26 -18.75,26 -19.5,27.5 -3,30.5 -2,30.8 0,30.8 3,33.5 3.2,34.5 3.253,36.204 3.394,37.901 -9.75,38 -0.75,38
GND: B1.3 B1.4 C4.2 C6.1 C10.2 C11.1 C12.1 C17.1 C18.1 C19.1 C20.1 C21.1 C22.1 C23.1 C24.1 C25.2 C26.2 C28.2 C31.1 C32.1 C33.1 D10.1 D11.1 D14.1 D16.1 J1.5 J1.S1 J1.S2 J1.S3 J1.S4 pad.2 Q1.2 Q1.4 R5.1 R6.1 R9.1 R10.2 R11.2 R19.1 R28.2 R29.1 R30.1 R35.1 R36.1 T9.2 T10.2 T11.2 U1.8 U1.23 U1.35 U1.47 U2.2 U3.2 U5.1 U7.2 U8.2 | length 24.5
  Top Layer w0.3: -33.658,-33.658 -30.688,-30.688
  Bottom Layer w0.3: U1.35@31.82,-6.01 32.739,-5.091 33.093,-5.091 v3(33.375,-4.808) ; 33.093,1.697 33.093,1.491 33.65,0.933 33.786,0.933 U1.47@35.002,-0.283 ; 36.628,-7.92 36.628,-8.273 U1.23@37.547,-9.192 ; v3(37.76,-3.536) 37.972,-3.748 38.325,-3.748 U1.8@39.669,-2.404 40.588,-1.485 40.588,-1.131
  Bottom Layer w0.4: 27.931,26.092 J1.5@29.398,27.56
  Bottom Layer w0.5: 37.017,-13.329 37.017,-15.167 C24.1@38.148,-16.299
  Bottom Layer w0.6: R36.1@-40.059,-30.725 -39.294,-30.725 U8.2@-38.518,-31.501 ; -39.988,-43.665 U7.2@-39.14,-42.817 -38.468,-42.145
  other v1: -41.7,-46.6 -6,-42 -4,-42 -2,-42 0,-42 2,-42 4,-42 10,-42 12,-42 -5,-40 -3,-40 -1,-40 1,-40 3,-40 9,-40 11,-40 13,-40 -18,-38 -16,-38 -4,-38 -2,-38 0,-38 2,-38 4,-38 10,-38 12,-38 18,-38 -47,-36 -21,-36 -19,-36 -17,-36 -3,-36 -1,-36 1,-36 3,-36 9,-36 21,-36 -22,-34 -20,-34 -18,-34 -16,-34 -4,-34 -2,-34 0,-34 2,-34 4,-34 16,-34 18,-34 24,-34 -35,-32 -21,-32 -17,-32 -15,-32 -5,-32 -3,-32 -1,-32 1,-32 3,-32 5,-32 7,-32 9,-32 11,-32 15,-32 17,-32 21,-32 23,-32 25,-32 27,-32 -41.5,-30.7 -16,-30 -14,-30 -12,-30 -10,-30 -8,-30 -6,-30 -4,-30 4,-30 6,-30 8,-30 10,-30 14,-30 20,-30 -13,-28 13,-28 16,-26 18,-26 32,-26 19,-24 25,-20 28.001,-12.304 37,16 41,16 40,18 39,20 36,22 38,22
  other v2: 39.25,16.75 34.25,23.75 36,23.75 32.25,25.5 34.25,25.5 31.254,29.557 20.577,31.183 29.486,31.325 21.425,32.032 19.658,32.103 20.506,32.951 21.425,33.87 17.536,34.648 18.385,35.497
  other v3: -39.706,-48.898 -36.6,-39.8 -31.432,-39.635 -47.75,-38.75 -38.645,-38.645 -45.928,-36.594 26.729,-14.991 31.396,-4.667 36.487,-4.243 28.991,19.94 17.324,25.527 13.011,27.719
LED_Blue_c: LD6.4 T8.3 | length 28.4
  Top Layer w0.35: 34.299,-19.83 35.182,-18.947 35.182,-18.388 33.623,-16.829 33.517,-16.829 31.611,-14.923 31.611,-13.679 31.772,-13.518 31.772,-12.609 31.113,-11.95 31.113,-10.324 32.737,-8.699 35.355,-8.699 LD6.4@36.434,-7.62
  Top Layer w0.4: v3(26.517,-16.334) 30.123,-19.94 34.189,-19.94 34.299,-19.83
  Bottom Layer w0.4: T8.3@25.845,-16.935 25.915,-16.935 v3(26.517,-16.334)
LED_Green_c: LD6.6 T6.3 | length 9.4
  Top Layer w0.35: v3(30.476,-13.081) 30.547,-13.011 30.013,-12.476 30.013,-9.766 32.179,-7.599 32.462,-7.599 LD6.6@33.627,-6.434
  Bottom Layer w0.4: T6.3@29.875,-13.683 v3(30.476,-13.081)
LED_POW: C6.2 C8.2 D2.2 LD1.1 LD1.2 LD1.3 R4.2 | length 19.3
  Top Layer w0.5: LD1.1@25.951,22.557 LD1.2@27.153,23.759 LD1.3@28.355,24.961
  Top Layer w1: LD1.2@27.153,23.759 28.85,22.062 29.557,22.062 v2(34.118,17.501)
  Bottom Layer w0.4: R4.2@30.724,15.097 31.608,15.981 C8.2@31.608,16.051 32.562,17.006 D2.2@33.199,17.006
  Bottom Layer w0.7: D2.2@33.199,17.006 33.269,17.006 33.941,17.678 C6.2@34.507,18.243
  Bottom Layer w1: v2(34.118,17.501) 34.507,17.89 34.507,18.243 C6.2@34.754,18.491
LED_Red_c: LD6.5 T7.3 | length 17.5
  Top Layer w0.35: 31.008,-14.886 31.008,-13.505 31.222,-13.29 31.222,-12.837 30.563,-12.178 30.563,-9.993 32.407,-8.149 33.823,-8.149 LD6.5@34.792,-7.18
  Top Layer w0.4: 31.008,-14.886 31.008,-15.168 v3(34.507,-18.668)
  Bottom Layer w0.4: v3(34.507,-18.668) 34.648,-18.809 34.648,-19.233 35.179,-19.764 T7.3@35.391,-19.764
NetB1_1: B1.1 B1.2 R27.1 U1.28 | length 47.9
  Top Layer w0.2: v3(19.163,-28.072) 19.847,-27.388 19.847,-23.853 24.749,-18.95 28.426,-18.95 29.916,-20.44 34.573,-20.44 36.12,-18.892 v3(36.12,-18.62)
  Bottom Layer w0.2: R27.1@33.199,-10.288 R27.1@33.057,-10.43 ; U1.28@34.295,-8.485 33.057,-9.723 R27.1@33.057,-10.43 ; v3(36.12,-18.62) 36.252,-18.62 37.194,-17.678 37.194,-17.253 36.398,-16.457 36.398,-16.387 35.992,-15.981 35.992,-14.779 35.521,-14.308 35.521,-13.742 33.022,-11.243 33.022,-10.465 R27.1@33.057,-10.43
  Bottom Layer w0.4: v3(19.163,-28.072) 18.88,-27.789 16.476,-27.789 15.839,-28.426 B1.2@15.768,-28.426 B1.1@20.506,-33.163
NetC5_2: C5.2 D3.2 R7.2 T2.1 | length 7.1
  Bottom Layer w0.4: D3.2@-37.923,1.097 -37.055,0.286 -35.992,0.495 C5.2@-34.666,-0.053
  Bottom Layer w0.6: T2.1@-38.338,-1.044 -37.949,1.091 D3.2@-37.923,1.097 ; -35.004,1.076 -34.983,1.08 C5.2@-34.666,-0.053
NetC7_2: C7.2 D6.2 R8.2 T3.1 | length 7.1
  Bottom Layer w0.6: T3.1@-31.807,-18.189 D6.2@-32.196,-20.325 R8.2@-29.128,-19.935 C7.2@-29.574,-18.155
NetC8_1: C8.1 R4.1 R6.2 U2.3 | length 4.5
  Bottom Layer w0.4: R6.2@28.744,15.238 R4.1@29.663,16.157 30.547,17.041 U2.3@29.168,18.42
NetC9_1: C9.1 R10.1 U3.4 | length 3
  Bottom Layer w0.4: U3.4@15.875,29.027 16.44,29.027 17.112,29.698 C9.1@17.395,29.698 18.208,28.885 R10.1@18.279,28.885
NetC9_2: C9.2 R3.1 U3.3 | length 2.9
  Bottom Layer w0.4: U3.3@14.107,30.724 U3.3@14.177,30.724 15.167,30.724 15.733,31.289 R3.1@15.733,31.36 C9.2@16.405,30.688
NetC22_2: C22.2 L6.2 U1.9 | length 9.2
  Top Layer w0.4: v4(41.436,-0.566) 43.134,1.131 v3(43.134,3.96)
  Bottom Layer w0.3: U1.9@40.022,-2.758 41.436,-1.344 v4(41.436,-0.566)
  Bottom Layer w0.7: L6.2@42.285,4.808 v3(43.134,3.96)
NetC23_2: C23.2 U1.19 | length 4.4
  Bottom Layer w0.25: U1.19@38.962,-7.778 39.81,-8.627 39.81,-10.819 C23.2@39.068,-11.561
NetC24_2: C24.2 U1.17 | length 8.7
  Bottom Layer w0.25: U1.17@39.669,-7.071 40.793,-8.196 40.793,-8.302 41.578,-9.086 41.578,-11.879 40.058,-13.4 C24.2@40.058,-14.39
NetC25_1: C25.1 Q1.1 U1.5 | length 6
  Bottom Layer w0.3: C25.1@37.123,1.98 37.406,1.98 37.618,2.192 ; Q1.1@38.184,2.758 37.618,2.192 ; U1.5@38.608,-1.344 39.381,-0.571 39.381,0.076 37.618,1.838 37.618,2.192
NetC26_1: C26.1 Q1.3 U1.6 | length 5.9
  Bottom Layer w0.3: U1.6@38.962,-1.697 39.881,-0.778 39.881,0.141 41.295,1.556 40.871,1.98 Q1.3@40.871,3.041
NetC27_1: C27.1 U7.1 | length 1.6
  Bottom Layer w0.5: C27.1@-41.261,-41.686 -40.271,-41.686 U7.1@-39.812,-42.145
NetC27_2: C27.2 D10.2 L8.1 U7.6 | length 7.1
  Bottom Layer w0.6: D10.2@-42.782,-40.802 -42.782,-41.226 -44.514,-42.958 -44.09,-43.383 -41.968,-43.383 ; C27.2@-42.251,-42.675 -42.251,-43.1 -41.968,-43.383 ; U7.6@-41.509,-43.842 -41.968,-43.383